# Altium PCB BAT-010.PcbDoc
Units mil, origin at the board's own origin, x right, y up, seen from the top; angles counter-clockwise.
Board outline 1750 x 1750 mil, 4 copper layers (L1 - Top Layer, L2 - GND, L3 - PWR, L4 - Bottom Layer), stack 62.178 mil thick; 15 components, 49 nets, 285 pads, 155 vias.
Unrouted connection lines stored in the file: 26.
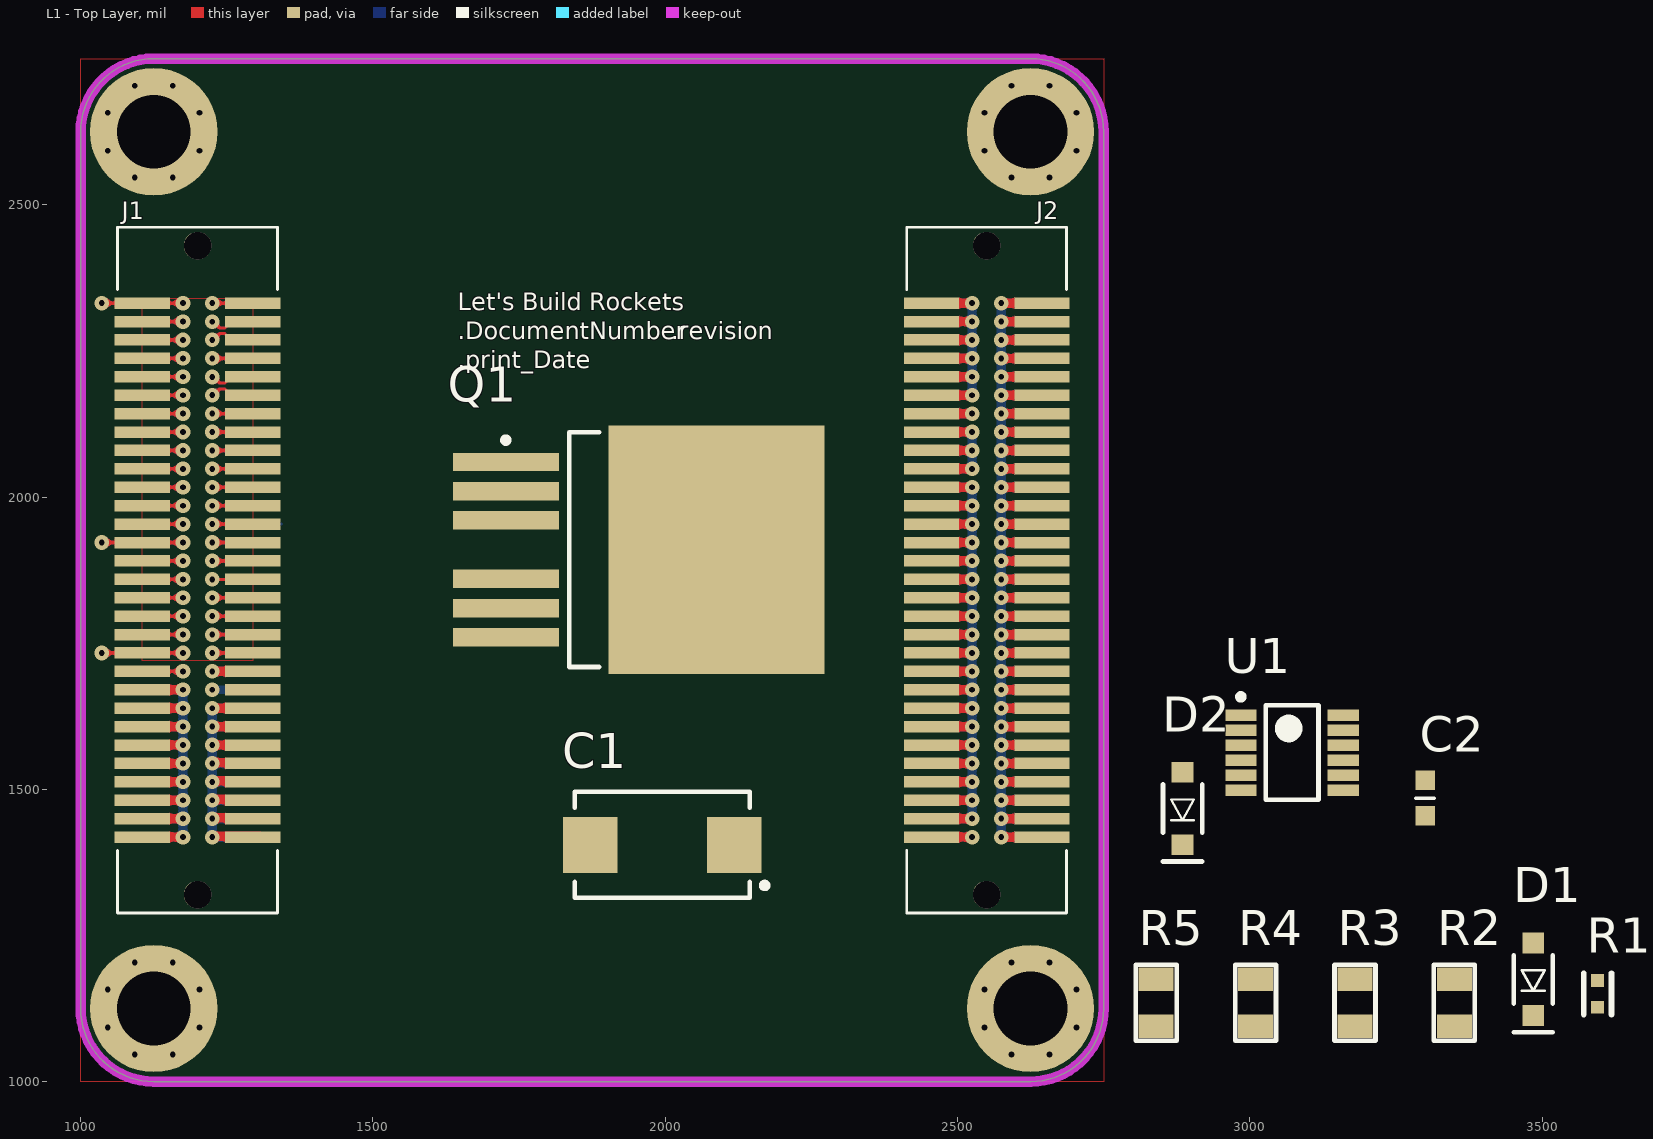
[diagram p0: L1 - Top Layer view]
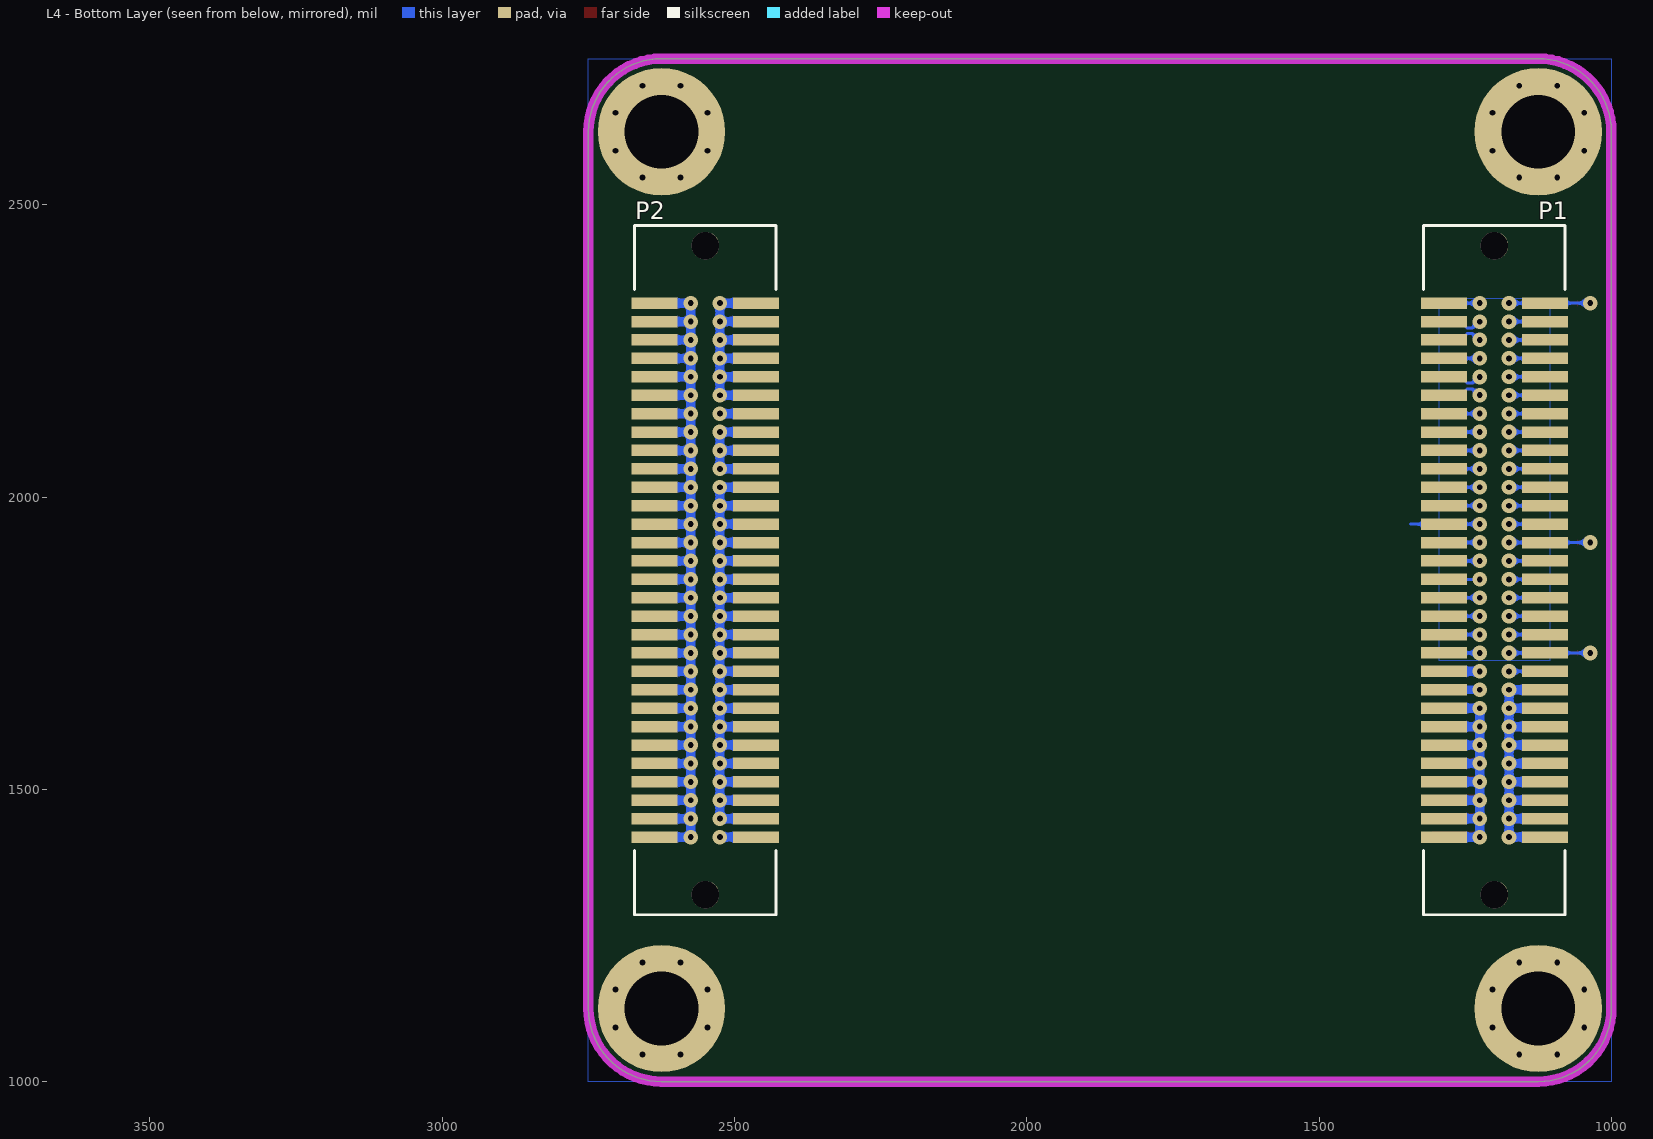
[diagram p1: L4 - Bottom Layer view, seen from below]
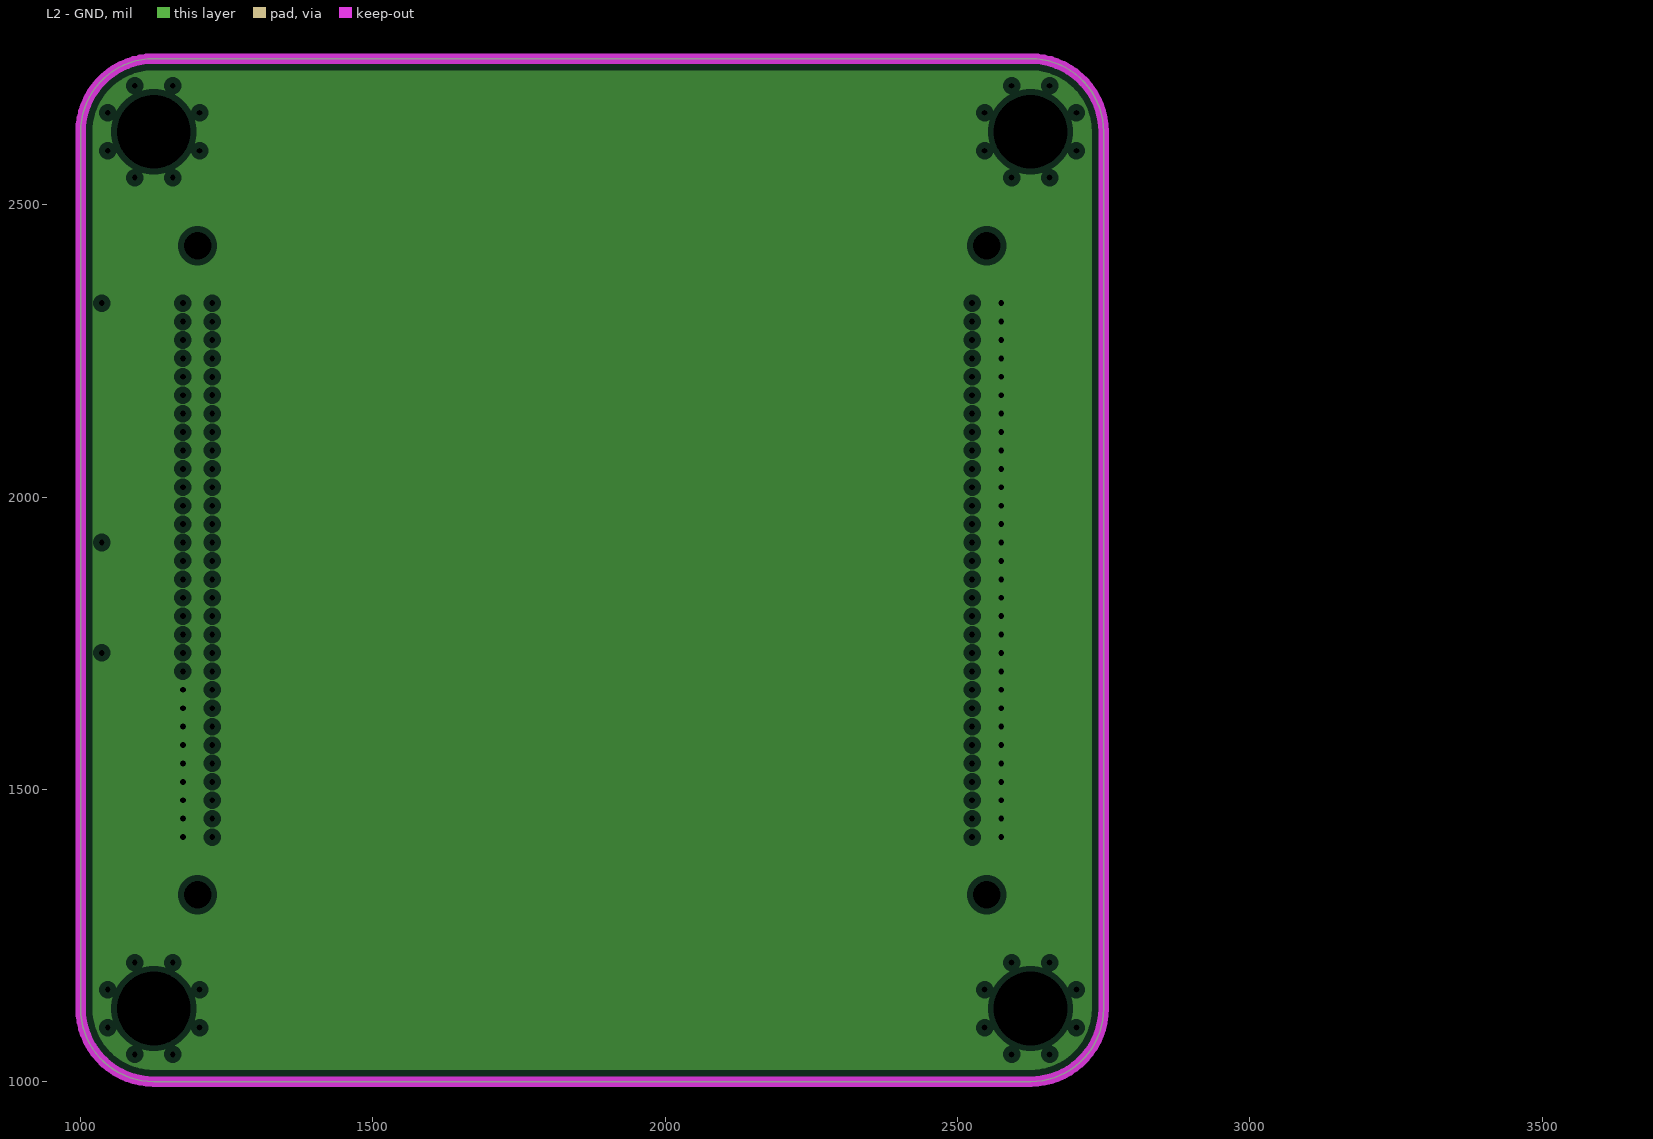
[diagram p2: L2 - GND, clearances drawn from the general rule]
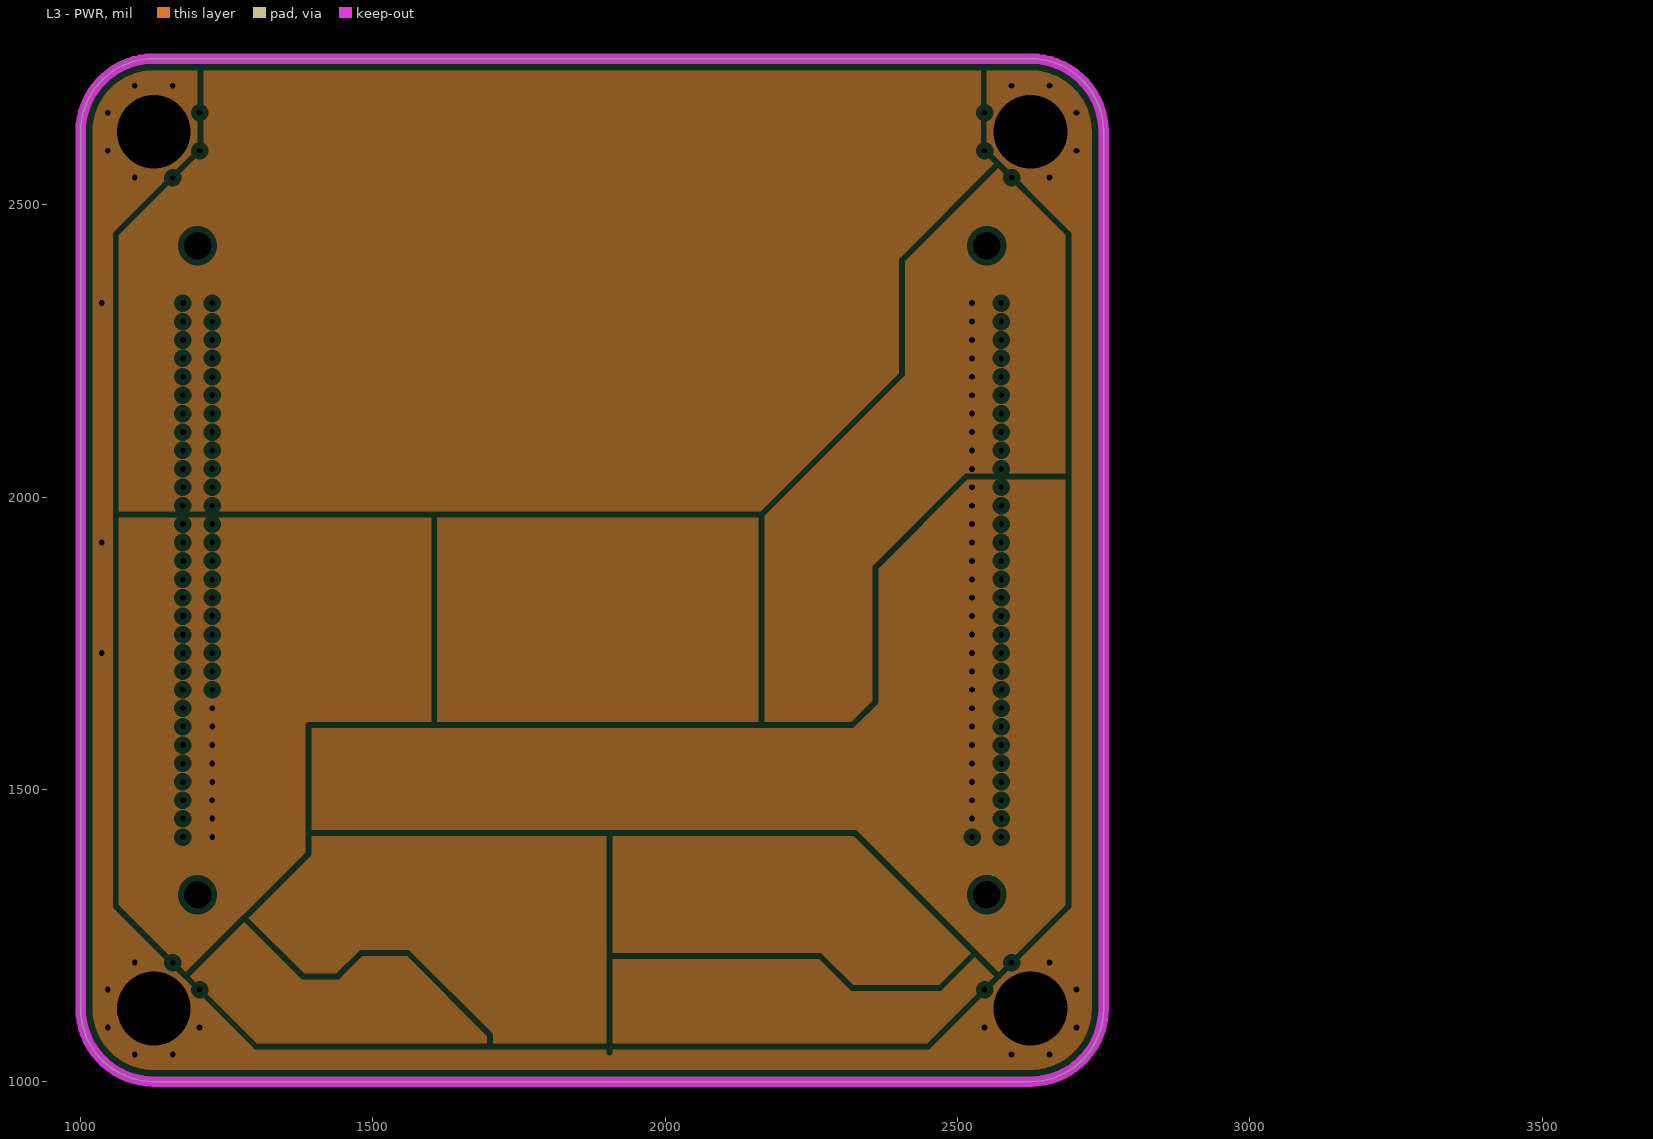
[diagram p3: L3 - PWR, clearances drawn from the general rule]

## Layer stack, top to bottom
Top Solder: solder mask 0.5, Solder Resist, Dk 3.8
L1 - Top Layer: signal copper 1.4
Dielectric 2: prepreg 4, PP-006, Dk 4.05
L2 - GND: plane copper 0.689, net GND
Dielectric 1: core 50, Core-043, Dk 4.3
L3 - PWR: plane copper 0.689, net (Multiple Nets)
Dielectric 3: prepreg 4, PP-006, Dk 4.05
L4 - Bottom Layer: signal copper 1.4
Bottom Solder: solder mask 0.5, Solder Resist, Dk 3.8

## Board outline
1000,1125 1000,2625 cw(c1125,2625) 1125,2750 2625,2750 cw(c2625,2625) 2750,2625 2750,1125 cw(c2625,1125) 2625,1000 1125,1000 cw(c1125,1125)

## Design rules (kind name [scope] priority, off if disabled: settings)
AssemblyTestPointUsage AssemblyTestPointUsage_1 [All] p2:
AssemblyTestpoint AssemblyTestpoint_1 [All] p2: testpointundercomponent=TRUE minsize=40 maxsize=100 preferedsize=60 minholesize=0 maxholesize=40 preferedholesize=32 testpointgrid=1 usegrid=TRUE gridtolerance=0.01 allowsidetop=TRUE allowsidebottom=TRUE
Clearance Clearance_HV [InNetClass('HIghVoltage')] p1: gap=6 ignorepadtopadclearanceinfootprint=FALSE except(10: Arc-Poly Track-Poly SMDPad-Poly THPad-Poly Via-Poly Fill-Poly Poly-Poly Poly-Region Poly-Text Poly-Hole)
Clearance [All] p2: gap=5 ignorepadtopadclearanceinfootprint=FALSE except(8: Arc-Poly Track-Poly SMDPad-Poly THPad-Poly Via-Poly Fill-Poly Poly-Poly Poly-Region Poly-Text Poly-Hole)
ComponentClearance ComponentClearance_1 [All] p2: gap=10 collisioncheckmode=3 verticalgap=10 showdistances=FALSE
DiffPairsRouting [All] p1: maxlimit=5 minlimit=5 mostfreqgap=5 toplayer_minwidth=5 toplayer_maxwidth=5 toplayer_prefwidth=5 bottomlayer_minwidth=5 bottomlayer_maxwidth=5 bottomlayer_prefwidth=5 impedanceprofiledriven=TRUE impedanceprofileid={FBA8A629-7972-4F76-A7E5-5756DC662DF8} impedanceprofilevalue=100.000000 maxuncoupledlength=500
FabricationTestPointUsage FabricationTestPointUsage_1 [All] p2: valid=0 allowmultiple=FALSE
FabricationTestpoint FabricationTestpoint_1 [All] p2: side=3 testpointundercomponent=TRUE minsize=40 maxsize=100 preferedsize=60 minholesize=0 maxholesize=40 preferedholesize=32 testpointgrid=1 allowsidetop=TRUE allowsidebottom=TRUE usegrid=TRUE gridtolerance=0.01
FanoutControl Fanout_LCC [IsLCC] p1: bgadir=Out bgaviamode=Centered fanoutstyle=Auto fanoutdirection=Alternating viagrid=1 // Fanout_LCC (Default Rule)
FanoutControl Fanout_BGA [IsBGA] p2: bgadir=Out bgaviamode=Centered fanoutstyle=Auto fanoutdirection=Alternating viagrid=1 // Fanout_BGA (Default Rule)
FanoutControl Fanout_Default [All] p4: bgadir=Out bgaviamode=Centered fanoutstyle=Auto fanoutdirection=Alternating viagrid=1 // Fanout_Default (Default Rule)
FanoutControl Fanout_Small [(CompPinCount < 5)] p5: bgadir=Out bgaviamode=Centered fanoutstyle=Auto fanoutdirection=OutThenIn viagrid=1 // Fanout_Small (Default Rule)
FanoutControl Fanout_BGA_1 [IsBGA] p6: bgadir=Out bgaviamode=Centered fanoutstyle=Auto fanoutdirection=Alternating viagrid=1 // Fanout_BGA (Default Rule)
FanoutControl Fanout_LCC_1 [IsLCC] p7: bgadir=Out bgaviamode=Centered fanoutstyle=Auto fanoutdirection=Alternating viagrid=1 // Fanout_LCC (Default Rule)
FanoutControl Fanout_SOIC_1 [IsSOIC] p8: bgadir=Out bgaviamode=Centered fanoutstyle=Auto fanoutdirection=Alternating viagrid=1 // Fanout_SOIC (Default Rule)
FanoutControl Fanout_Small_1 [(CompPinCount < 5)] p9: bgadir=Out bgaviamode=Centered fanoutstyle=Auto fanoutdirection=OutThenIn viagrid=1 // Fanout_Small (Default Rule)
FanoutControl Fanout_Default_1 [All] p10: bgadir=Out bgaviamode=Centered fanoutstyle=Auto fanoutdirection=Alternating viagrid=1 // Fanout_Default (Default Rule)
Height Height_Bottom [TouchesRoom('BoardHeight_Bottom') and OnBottom and not ((Name='J1') or (Name='J2') or (Name='P1') or (Name='P2') )] p1: minheight=0 maxheight=152 prefheight=0
Height Height_Top [TouchesRoom('BoardHeight_Top') and OnTop and not ((Name='J1') or (Name='J2') or (Name='P1') or (Name='P2') )] p2: minheight=0 maxheight=310 prefheight=0
HoleSize [All] p1: absolutevalues=TRUE maxlimit=130 minlimit=10 maxpercent=80.000 minpercent=20.000
MinimumSolderMaskSliver [All] p1: minsoldermaskwidth=3
PlaneClearance [All] p1: clearance=10
PlaneConnect [All] p1: pad.planeconnectstyle=Relief pad.reliefexpansion=10 pad.reliefentries=4 pad.reliefconductorwidth=10 pad.reliefairgap=10 via.planeconnectstyle=Direct via.reliefexpansion=20 via.reliefentries=4 via.reliefconductorwidth=10 via.reliefairgap=10
PolygonConnect [All] p1: thpad.connectstyle=Relief thpad.reliefconductorwidth=10 thpad.reliefentries=4 thpad.polygonreliefangle="90 Angle" thpad.airgapwidth=10 smdpad.connectstyle=Relief smdpad.reliefconductorwidth=9 smdpad.reliefentries=4 smdpad.polygonreliefangle="90 Angle" smdpad.airgapwidth=5 via.connectstyle=Direct via.reliefconductorwidth=10 via.reliefentries=4 via.polygonreliefangle="90 Angle" via.airgapwidth=10
RoomDefinition BoardHeight_Top [False] p1: confinementstyle=ConfineIn formatcopy=TRUE lockcomponents=FALSE outline 2750,2750 1000,2750 1000,1000 2750,1000
RoomDefinition BoardHeight_Bottom [False] p2: confinementstyle=ConfineIn formatcopy=TRUE lockcomponents=FALSE outline 1000,2750 2750,2750 2750,1000 1000,1000
RoutingVias [All] p1: holewidth=10 width=25 viastyle="Through Hole" minholewidth=10 minwidth=25 maxholewidth=28 maxwidth=50
SilkToBoardRegionClearance SilkToBoardRegionClearance_1 [All] p2:
SilkToSilkClearance [All] p1: silktosilkclearance=2
SilkToSolderMaskClearance [IsPad] p1: minsilkscreentomaskgap=4 clearancetoexposedcopper=TRUE
SolderMaskExpansion [All] p1: expansion=2 istentingtop=FALSE
UnRoutedNet [All] p1: checkbadconnections=TRUE
Width [All] p1: maxlimit=25 minlimit=5 preferedwidth=10 minimp=50.000000 maximp=50.000000 favimp=50.000000
17 further rules are at their usual default settings.

## Classes and differential pairs
component class Sheet2: C1 C2 D1 D2 Q1 Q3 R1 R2 R3 R4 R5 R? U1 U?
net class HIghVoltage: +VBAT +VBAT_BOOTSTRAP
component class Sheet1: J1 J2 P1 P2
differential pair CAN1: +CAN1_P -CAN1_N
differential pair CAN0: +CAN0_P -CAN0_N

## Components (designator, comment, footprint, x,y, rotation, side; value= is the part's Value field where it differs from the comment)
C1 "T521X226M063ATE075" "KEMET X - CAPMP7343X43N" 1995,1405 r180 top value=22uF
C2 "0.022µF" SMD-0603C 3300,1485 r0 top
D1 "SBR0560S1Q-7" SOD123 3485,1175 r90 top
D2 "1N4148WQ-7-F" SOD123 2885,1467.01 r90 top
J1 "10144517-062802LF" 10144517-062802LF 1200,1875 r90 top locked
J2 "10144517-062802LF" 10144517-062802LF 2550,1875 r90 top locked
P1 "10144518-064802LF" 10144518-064802LF 1200,1875 r270 bottom locked
P2 "10144518-064802LF" 10144518-064802LF 2550,1875 r270 bottom locked
Q1 "IPB180N10S402ATMA1" "DPAK127P1500X440-7N (PG-TO263-7-3)" 1940,1910 r0 top
R1 "1k" SMD-0402-RES 3595,1150 r0 top
R2 "931k" SMD-0805-RES 3350,1135 r0 top
R3 "3.9k" SMD-0805-RES 3180,1135 r0 top
R4 "38.3k" SMD-0805-RES 3010,1135 r0 top
R5 "22.1k" SMD-0805-RES 2840,1135 r0 top
U1 "LTC4231HMS-2#WPBF" TSOP65P490X109-12N 3072.4,1562.8 r0 top

## Footprints (in the part's own frame and the unit in brackets; to place one, negate y for a bottom-side part, rotate by r counter-clockwise, add the part's x,y. Pads: shape width x height; smd on the part's side, far side on the other; paste and mask are expansions set on the pad)
10144517-062802LF [mm]
  rect 0.5x2.4 smd: 1(11.6,2.4) 2(11.6,-2.4) 3(10.8,2.4) 4(10.8,-2.4) 5(10,2.4) 6(10,-2.4) 7(9.2,2.4) 8(9.2,-2.4) 9(8.4,2.4) 10(8.4,-2.4) 11(7.6,2.4) 12(7.6,-2.4) 13(6.8,2.4) 14(6.8,-2.4) 15(6,2.4) 16(6,-2.4) 17(5.2,2.4) 18(5.2,-2.4) 19(4.4,2.4) 20(4.4,-2.4) 21(3.6,2.4) 22(3.6,-2.4) 23(2.8,2.4) 24(2.8,-2.4) 25(2,2.4) 26(2,-2.4) 27(1.2,2.4) 28(1.2,-2.4) 29(0.4,2.4) 30(0.4,-2.4) 31(-0.4,2.4) 32(-0.4,-2.4) 33(-1.2,2.4) 34(-1.2,-2.4) 35(-2,2.4) 36(-2,-2.4) 37(-2.8,2.4) 38(-2.8,-2.4) 39(-3.6,2.4) 40(-3.6,-2.4) 41(-4.4,2.4) 42(-4.4,-2.4) 43(-5.2,2.4) 44(-5.2,-2.4) 45(-6,2.4) 46(-6,-2.4) 47(-6.8,2.4) 48(-6.8,-2.4) 49(-7.6,2.4) 50(-7.6,-2.4) 51(-8.4,2.4) 52(-8.4,-2.4) 53(-9.2,2.4) 54(-9.2,-2.4) 55(-10,2.4) 56(-10,-2.4) 57(-10.8,2.4) 58(-10.8,-2.4) 59(-11.6,2.4) 60(-11.6,-2.4)
  round 1.2 hole 1.2 unplated: M1(14.1,0)
  silkscreen extent -14.9,-3.47 14.9,3.47, body extent -14.9,-3.4 14.9,3.4, height 7.65
10144518-064802LF [mm]
  rect 0.5x2 smd: 1(-11.6,2.2) 2(-11.6,-2.2) 3(-10.8,2.2) 4(-10.8,-2.2) 5(-10,2.2) 6(-10,-2.2) 7(-9.2,2.2) 8(-9.2,-2.2) 9(-8.4,2.2) 10(-8.4,-2.2) 11(-7.6,2.2) 12(-7.6,-2.2) 13(-6.8,2.2) 14(-6.8,-2.2) 15(-6,2.2) 16(-6,-2.2) 17(-5.2,2.2) 18(-5.2,-2.2) 19(-4.4,2.2) 20(-4.4,-2.2) 21(-3.6,2.2) 22(-3.6,-2.2) 23(-2.8,2.2) 24(-2.8,-2.2) 25(-2,2.2) 26(-2,-2.2) 27(-1.2,2.2) 28(-1.2,-2.2) 29(-0.4,2.2) 30(-0.4,-2.2) 31(0.4,2.2) 32(0.4,-2.2) 33(1.2,2.2) 34(1.2,-2.2) 35(2,2.2) 36(2,-2.2) 37(2.8,2.2) 38(2.8,-2.2) 39(3.6,2.2) 40(3.6,-2.2) 41(4.4,2.2) 42(4.4,-2.2) 43(5.2,2.2) 44(5.2,-2.2) 45(6,2.2) 46(6,-2.2) 47(6.8,2.2) 48(6.8,-2.2) 49(7.6,2.2) 50(7.6,-2.2) 51(8.4,2.2) 52(8.4,-2.2) 53(9.2,2.2) 54(9.2,-2.2) 55(10,2.2) 56(10,-2.2) 57(10.8,2.2) 58(10.8,-2.2) 59(11.6,2.2) 60(11.6,-2.2)
  round 1.2 hole 1.2 unplated: M2(14.1,0)
  silkscreen extent -14.97,-3.08 14.97,3.08, body extent -14.9,-3 14.9,3, height 7.65
"DPAK127P1500X440-7N (PG-TO263-7-3)" [mm] "D2-PAK, 7-Pads, Body 7.82x8.46mm (max), IPC Medium Density"
  rect 9.4x10.8 smd: D(3.75,0)
  rect 4.6x0.8 smd: G(-5.4,3.81) S(-5.4,-3.81) S(-5.4,-2.54) S(-5.4,-1.27) S(-5.4,1.27) S(-5.4,2.54)
  silkscreen extent -5.52,-5.1 -1.35,5.1, body extent -7.05,-5.1 7.95,5.1, height 4.5
"KEMET X - CAPMP7343X43N" [mm] "Molded Capacitor, 2-Leads, Body 7.30x4.30mm, IPC Medium Density"
  rect 2.37x2.43 smd: 1(-3.12,0) 2(3.12,0)
  silkscreen extent -4.57,-2.3 3.8,2.3, body extent -4.02,-2.3 4.02,2.3, height 4.3
SMD-0402-RES [mm]
  rect 0.55x0.55 smd: 1(0,0.584) 2(0,-0.584)
  silkscreen extent -0.6,-0.9 0.6,0.9, body extent -0.28,-0.57 0.27,0.58, height 0.41
SMD-0603C [mm]
  rect 0.85x0.85 smd: 1(0,0.775) 2(0,-0.775)
  silkscreen extent -0.4,0 0.4,0, body extent -0.4,-0.8 0.4,0.8, height 0.9
SMD-0805-RES [mil]
  rect 60x40 smd: 1(0,40) 2(0,-40)
  silkscreen extent -35,-65 35,65, body extent -24,-39 26,39, height 31
SOD123 [mm] "SOD123 2-Leads, Body 1.55x2.70mm, Pitch 0.50mm, IPC Medium Density"
  rect 0.9x0.95 smd: A(1.575,0) K(-1.575,0)
  silkscreen extent -2.3,-0.85 1.05,0.85, body extent -1.85,-0.85 1.85,0.85, height 1.45
TSOP65P490X109-12N [mm] "TSOP, 12-Leads, Body 4.04x3.00mm, Pitch 0.65mm, IPC Medium Density"
  rect 1.35x0.5 smd mask+0.05: 1(-2.225,1.625) 2(-2.225,0.975) 3(-2.225,0.325) 4(-2.225,-0.325) 5(-2.225,-0.975) 6(-2.225,-1.625) 7(2.225,-1.625) 8(2.225,-0.975) 9(2.225,-0.325) 10(2.225,0.325) 11(2.225,0.975) 12(2.225,1.625)
  silkscreen extent -2.35,-2.05 1.15,2.55, body extent -2.45,-2.05 2.45,2.05, height 1.09

## Part data
C1: Voltage=63V, ESR=75mohm, Unit Price (USD)=7.09
C2: library part GCJ188R72A223KA01D, "CAP CER 0.022UF 100V X7R 0603", Digi-Key Part Number=490-5769-1-ND, Manufacturer="Murata Electronics North America", Operating Temperature="-55°C ~ 125°C", Package / Case="0603 (1608 Metric)", Ratings=AEC-Q200, Temperature Coefficient=X7R, Tolerance=±10%, Voltage=100V, @ qty=0, Applications="Automotive, Boardflex Sensitive", Datasheets=http://www.murata.com/~/media/webrenewal/support/library/catalog/products/capacitor/mlcc/c03e.ashx, Factory Stock=0, Features="Soft Termination", Height - Seated (Max)=-, Image=//media.digikey.com/Renders/Murata%20Renders/0603%28LQG18%29.jpg, Lead Spacing=-, Lead Style=-, Minimum Quantity=1, Mounting Type="Surface Mount, MLCC", Packaging="Cut Tape (CT)", Part Number=GCJ188R72A223KA01D, Part Status=Active, Quantity Available=40437, Series=GCJ, Size / Dimension="0.063\" L x 0.031\" W (1.60mm x 0.80mm)", Thickness (Max)="0.031\" (0.80mm)", Unit Price (USD)=0.26
Q1: Operating Temperature="-55°C ~ 175°C", Power Dissipation=300W, Ciss=14600pF, Id=180A, Qg=200nC, Rds=2.5mohm, Unit Price (USD)=5.65, VDS=100V, Vgs=20V
R1: library part ERJ-2GEJ102X, "RES SMD 1K OHM 5% 1/10W 0402", Digi-Key Part Number=P1.0KJCT-ND, Manufacturer="Panasonic Electronic Components", Operating Temperature="-55°C ~ 155°C", Package / Case="0402 (1005 Metric)", Power (Watts)="0.1W, 1/10W", Supplier Device Package=0402, Temperature Coefficient=±200ppm/°C, Tolerance=±5%, @ qty=1500, Composition="Thick Film", Datasheets=http://industrial.panasonic.com/www-cgi/jvcr13pz.cgi?E+PZ+3+AOA0001+ERJ2GEJ102X+7+WW, Factory Stock=0, Failure Rate=-, Features="Automotive AEC-Q200", Height - Seated (Max)="0.016\" (0.40mm)", Image=//media.digikey.com/Photos/Panasonic%20Photos/ERJ-PA2-Series.jpg, Minimum Quantity=1, Number of Terminations=2, Packaging="Cut Tape (CT)", Part Number=ERJ-2GEJ102X, Part Status=Active, Quantity Available=1939857, Series=ERJ, Size / Dimension="0.039\" L x 0.020\" W (1.00mm x 0.50mm)", Unit Price (USD)=0.00350
R2: library part ERJ-PB6B9313V, "RES SMD 931K OHM 0.1% 1/4W 0805", Digi-Key Part Number=P20933CT-ND, Manufacturer="Panasonic Electronic Components", Operating Temperature="-55°C ~ 155°C", Package / Case="0805 (2012 Metric)", Power (Watts)="0.25W, 1/4W", Supplier Device Package=0805, Temperature Coefficient=±50ppm/°C, Tolerance=±0.1%, @ qty=1000, Composition="Thick Film", Datasheets=https://industrial.panasonic.com/cdbs/www-data/pdf/RDA0000/AOA0000C100.pdf, Factory Stock=0, Failure Rate=-, Features="Automotive AEC-Q200, Pulse Withstanding", Height - Seated (Max)="0.028\" (0.70mm)", Image=//media.digikey.com/Renders/Panasonic%20Renders/ERJ-0805%20Pkg.jpg, Minimum Quantity=1, Number of Terminations=2, Packaging="Cut Tape (CT)", Part Number=ERJ-PB6B9313V, Part Status=Active, Quantity Available=10000, Series=ERJ, Size / Dimension="0.079\" L x 0.049\" W (2.00mm x 1.25mm)", Unit Price (USD)=0.04554
R3: library part ERJ-PB6B3901V, "RES SMD 3.9K OHM 0.1% 1/4W 0805", Digi-Key Part Number=P20660CT-ND, Manufacturer="Panasonic Electronic Components", Operating Temperature="-55°C ~ 155°C", Package / Case="0805 (2012 Metric)", Power (Watts)="0.25W, 1/4W", Supplier Device Package=0805, Temperature Coefficient=±50ppm/°C, Tolerance=±0.1%, @ qty=1000, Composition="Thick Film", Datasheets=https://industrial.panasonic.com/cdbs/www-data/pdf/RDA0000/AOA0000C100.pdf, Factory Stock=0, Failure Rate=-, Features="Automotive AEC-Q200, Pulse Withstanding", Height - Seated (Max)="0.028\" (0.70mm)", Image=//media.digikey.com/Renders/Panasonic%20Renders/ERJ-0805%20Pkg.jpg, Minimum Quantity=1, Number of Terminations=2, Packaging="Cut Tape (CT)", Part Number=ERJ-PB6B3901V, Part Status=Active, Quantity Available=10000, Series=ERJ, Size / Dimension="0.079\" L x 0.049\" W (2.00mm x 1.25mm)", Unit Price (USD)=0.04554
R4: library part ERJ-PB6B3832V, "RES SMD 38.3K OHM 0.1% 1/4W 0805", Digi-Key Part Number=P20773CT-ND, Manufacturer="Panasonic Electronic Components", Operating Temperature="-55°C ~ 155°C", Package / Case="0805 (2012 Metric)", Power (Watts)="0.25W, 1/4W", Supplier Device Package=0805, Temperature Coefficient=±50ppm/°C, Tolerance=±0.1%, @ qty=1000, Composition="Thick Film", Datasheets=https://industrial.panasonic.com/cdbs/www-data/pdf/RDA0000/AOA0000C100.pdf, Factory Stock=0, Failure Rate=-, Features="Automotive AEC-Q200, Pulse Withstanding", Height - Seated (Max)="0.028\" (0.70mm)", Image=//media.digikey.com/Renders/Panasonic%20Renders/ERJ-0805%20Pkg.jpg, Minimum Quantity=1, Number of Terminations=2, Packaging="Cut Tape (CT)", Part Number=ERJ-PB6B3832V, Part Status=Active, Quantity Available=10000, Series=ERJ, Size / Dimension="0.079\" L x 0.049\" W (2.00mm x 1.25mm)", Unit Price (USD)=0.04554
R5: library part ERJ-PB6B2212V, "RES SMD 22.1K OHM 0.1% 1/4W 0805", Digi-Key Part Number=P20745CT-ND, Manufacturer="Panasonic Electronic Components", Operating Temperature="-55°C ~ 155°C", Package / Case="0805 (2012 Metric)", Power (Watts)="0.25W, 1/4W", Supplier Device Package=0805, Temperature Coefficient=±50ppm/°C, Tolerance=±0.1%, @ qty=1000, Composition="Thick Film", Datasheets=https://industrial.panasonic.com/cdbs/www-data/pdf/RDA0000/AOA0000C100.pdf, Factory Stock=0, Failure Rate=-, Features="Automotive AEC-Q200, Pulse Withstanding", Height - Seated (Max)="0.028\" (0.70mm)", Image=//media.digikey.com/Renders/Panasonic%20Renders/ERJ-0805%20Pkg.jpg, Minimum Quantity=1, Number of Terminations=2, Packaging="Cut Tape (CT)", Part Number=ERJ-PB6B2212V, Part Status=Active, Quantity Available=10000, Series=ERJ, Size / Dimension="0.079\" L x 0.049\" W (2.00mm x 1.25mm)", Unit Price (USD)=0.04554
D1: Unit Price (USD)=0.37
D2: Unit Price (USD)=0.19
J1 J2: Unit Price (USD)=1.28
P1 P2: Unit Price (USD)=1.52
U1: Unit Price (USD)=8.24

## Free pads (board coordinates)
  round 218 hole 125.98: 0(1125,1125) 0(1125,2625) 0(2625,1125) 0(2625,2625)

## Via types
v1: diameter 25, hole 10, L1 - Top Layer to L4 - Bottom Layer, tented both sides, 155 vias

## Nets (pads, with @x,y where several pads share a name; then routed paths per layer and width w, separated by ;. In a path a pad name is that pad's centre, name@x,y a point inside that pad or via, vN(x,y) a via of type N, cw(c..) or ccw(c..) an arc to the next point about the centre after c; other vN are vias at no path point)
+0.9V_REF: J1.42 P1.42 | length 131.1
  L1 - Top Layer w15: v1(1225,1701.77) J1.42
  L4 - Bottom Layer w15: v1(1225,1701.77) P1.42
+5V: J1.46 J1.48 J1.50 J1.52 J1.54 J1.56 J1.58 J1.60 P1.46 P1.48 P1.50 P1.52 P1.54 P1.56 P1.58 P1.60 | length 1269.3
  L1 - Top Layer w15: v1(1225,1575.79) J1.50 ; v1(1225,1607.28) J1.48 ; v1(1225,1638.78) J1.46 ; v1@1235.51,1420 J1.60@1305,1420 ; v1@1235.51,1451.5 J1.58@1305,1451.5 ; v1@1235.51,1482.99 J1.56@1305,1482.99 ; v1@1235.51,1514.49 J1.54@1305,1514.49 ; v1@1235.51,1545.98 J1.52@1305,1545.98
  L4 - Bottom Layer w15: P1.60 v1(1225,1418.31) v1(1225,1449.8) ; P1.58 v1(1225,1449.8) ; P1.56 v1(1225,1481.3) ; P1.54 v1(1225,1512.8) ; P1.52 v1(1225,1544.29) ; P1.50 v1(1225,1575.79) ; P1.48 v1(1225,1607.28) ; P1.46 v1(1225,1638.78) v1(1225,1607.28) ; v1(1225,1449.8) v1(1225,1481.3) ; v1(1225,1481.3) v1(1225,1512.8) ; v1(1225,1512.8) v1(1225,1544.29) ; v1(1225,1544.29) v1(1225,1575.79) ; v1(1225,1575.79) v1(1225,1607.28)
+5V_BOOTSTRAP: J1.44 P1.44 | length 61.6
  L4 - Bottom Layer w15: v1(1225,1670.28) P1.44
+12V: J2.1 J2.3 J2.5 J2.7 J2.9 J2.11 J2.13 J2.15 J2.17 J2.19 P2.1 P2.3 P2.5 P2.7 P2.9 P2.11 P2.13 P2.15 P2.17 P2.19 | length 1531.5
  L1 - Top Layer w15: J2.19 v1(2525,2048.23) ; J2.17 v1(2525,2079.72) ; J2.15 v1(2525,2111.22) ; J2.13 v1(2525,2142.72) ; J2.11 v1(2525,2174.21) ; J2.9 v1(2525,2205.71) ; J2.7 v1(2525,2237.2) ; J2.5 v1(2525,2268.7) ; J2.3 v1(2525,2300.2) ; J2.1 v1(2525,2331.69)
  L4 - Bottom Layer w15: P2.19 v1(2525,2048.23) v1(2525,2079.72) ; P2.17 v1(2525,2079.72) ; P2.15 v1(2525,2111.22) v1(2525,2079.72) ; P2.13 v1(2525,2142.72) ; P2.11 v1(2525,2174.21) v1(2525,2205.71) ; P2.9 v1(2525,2205.71) ; P2.7 v1(2525,2237.2) ; P2.5 v1(2525,2268.7) ; P2.3 v1(2525,2300.2) ; P2.1 v1(2525,2331.69) v1(2525,2300.2) ; v1(2525,2205.71) v1(2525,2237.2) ; v1(2525,2237.2) v1(2525,2268.7) ; v1(2525,2268.7) v1(2525,2300.2)
+VBAT: C1.1 J2.21 J2.23 J2.25 J2.27 J2.29 J2.31 J2.33 J2.35 J2.37 J2.39 J2.41 J2.43 J2.45 J2.47 J2.49 J2.51 J2.53 J2.55 J2.57 P2.21 P2.23 P2.25 P2.27 P2.29 P2.31 P2.33 P2.35 P2.37 P2.39 P2.41 P2.43 P2.45 P2.47 P2.49 P2.51 P2.53 P2.55 P2.57 | length 3057.9
  L1 - Top Layer w15: J2.57 v1(2525,1449.8) ; J2.55 v1(2525,1481.3) ; J2.53 v1(2525,1512.8) ; J2.51 v1(2525,1544.29) ; J2.49 v1(2525,1575.79) ; J2.47 v1(2525,1607.28) ; J2.45 v1(2525,1638.78) ; J2.43 v1(2525,1670.28) ; J2.41 v1(2525,1701.77) ; J2.39 v1(2525,1733.27) ; J2.37 v1(2525,1764.76) ; J2.35 v1(2525,1796.26) ; J2.33 v1(2525,1827.76) ; J2.31 v1(2525,1859.25) ; J2.29 v1(2525,1890.75) ; J2.27 v1(2525,1922.24) ; J2.25 v1(2525,1953.74) ; J2.23 v1(2525,1985.24) ; J2.21 v1(2525,2016.73)
  L4 - Bottom Layer w15: P2.57 v1(2525,1449.8) v1(2525,1481.3) ; P2.55 v1(2525,1481.3) ; P2.53 v1(2525,1512.8) ; P2.51 v1(2525,1544.29) ; P2.49 v1(2525,1575.79) ; P2.47 v1(2525,1607.28) ; P2.45 v1(2525,1638.78) ; P2.43 v1(2525,1670.28) ; P2.41 v1(2525,1701.77) ; P2.39 v1(2525,1733.27) ; P2.37 v1(2525,1764.76) ; P2.35 v1(2525,1796.26) ; P2.33 v1(2525,1827.76) ; P2.31 v1(2525,1859.25) ; P2.29 v1(2525,1890.75) ; P2.27 v1(2525,1922.24) ; P2.25 v1(2525,1953.74) ; P2.23 v1(2525,1985.24) ; P2.21 v1(2525,2016.73) v1(2525,1985.24) ; v1(2525,1481.3) v1(2525,1512.8) ; v1(2525,1512.8) v1(2525,1544.29) ; v1(2525,1544.29) v1(2525,1575.79) ; v1(2525,1575.79) v1(2525,1607.28) ; v1(2525,1607.28) v1(2525,1638.78) ; v1(2525,1638.78) v1(2525,1670.28) ; v1(2525,1670.28) v1(2525,1701.77) ; v1(2525,1701.77) v1(2525,1733.27) ; v1(2525,1733.27) v1(2525,1764.76) ; v1(2525,1764.76) v1(2525,1796.26) ; v1(2525,1796.26) v1(2525,1827.76) ; v1(2525,1827.76) v1(2525,1859.25) ; v1(2525,1859.25) v1(2525,1890.75) ; v1(2525,1890.75) v1(2525,1922.24) ; v1(2525,1922.24) v1(2525,1953.74) ; v1(2525,1953.74) v1(2525,1985.24)
+VBAT_BOOTSTRAP: D1.K J2.59 P2.59 | length 131.1
  L1 - Top Layer w15: J2.59 v1(2525,1418.31)
  L4 - Bottom Layer w15: P2.59 v1(2525,1418.31)
+VIN: D1.A R2.1 U1.2 U1.3
CAN0_N: J1.4 P1.4 | length 149.3
  L1 - Top Layer w5: v1(1225,2299.95) 1227.43,2299.95 1237.93,2289.45 1246.82,2289.45 1249.74,2292.38 1249.74,2292.85 1257.09,2300.2 J1.4
  L4 - Bottom Layer w5: v1(1225,2299.95) 1227.43,2299.95 1237.93,2289.45 1246.82,2289.45 1249.74,2292.38 1249.74,2292.85 1257.09,2300.2 P1.4
CAN0_P: J1.6 P1.6 | length 149.3
  L1 - Top Layer w5: v1(1225,2268.95) 1227.43,2268.95 1237.93,2279.45 1246.82,2279.45 1249.74,2276.52 1249.74,2276.04 1257.09,2268.7 J1.6
  L4 - Bottom Layer w5: v1(1225,2268.95) 1227.43,2268.95 1237.93,2279.45 1246.82,2279.45 1249.74,2276.52 1249.74,2276.04 1257.09,2268.7 P1.6
CAN1_N: J1.10 P1.10 | length 149.3
  L1 - Top Layer w5: v1(1225,2205.46) 1227.43,2205.46 1237.93,2194.96 1246.82,2194.96 1249.74,2197.89 1249.74,2198.37 1257.09,2205.71 J1.10
  L4 - Bottom Layer w5: v1(1225,2205.46) 1227.43,2205.46 1237.93,2194.96 1246.82,2194.96 1249.74,2197.89 1249.74,2198.37 1257.09,2205.71 P1.10
CAN1_P: J1.12 P1.12 | length 149.3
  L1 - Top Layer w5: v1(1225,2174.46) 1227.43,2174.46 1237.93,2184.96 1246.82,2184.96 1249.74,2182.03 1249.74,2181.55 1257.09,2174.21 J1.12
  L4 - Bottom Layer w5: v1(1225,2174.46) 1227.43,2174.46 1237.93,2184.96 1246.82,2184.96 1249.74,2182.03 1249.74,2181.56 1257.09,2174.21 P1.12
CTRL_SYNC: J1.26 P1.26 | length 188.2
  L1 - Top Layer w5: v1(1225,1953.74) J1.26
  L4 - Bottom Layer w5: v1(1225,1953.74) P1.26 1343.74,1953.74
DETECT: J1.32 P1.32 | length 131.1
  L1 - Top Layer w5: v1(1225,1859.25) J1.32
  L4 - Bottom Layer w5: v1(1225,1859.25) P1.32
DRAIN: J1.1 J1.2 J1.8 J1.14 J1.20 J1.24 J1.27 J1.28 J1.39 J1.40 P1.1 P1.2 P1.8 P1.14 P1.20 P1.24 P1.27 P1.28 P1.39 P1.40 pad.0 | length 1704.3
  L1 - Top Layer w5: v1(1036.02,1733.27) J1.39 v1(1175,1733.27) ; v1(1036.02,1922.24) J1.27 v1(1175,1922.24) ; v1(1036.02,2331.69) J1.1 v1(1175,2331.69) ; v1(1225,1733.27) J1.40 ; v1(1225,1922.24) J1.28 ; v1(1225,1985.24) J1.24 ; v1(1225,2048.23) J1.20 ; v1(1225,2142.72) J1.14 ; v1(1225,2237.2) J1.8 ; v1(1225,2331.69) J1.2
  L4 - Bottom Layer w5: v1(1036.02,1733.27) P1.39@1097.64,1733.27 ; v1(1036.02,1922.24) P1.27@1097.64,1922.24 ; v1(1036.02,2331.69) P1.1@1097.64,2331.69 ; P1.39 v1(1175,1733.27) ; P1.27 v1(1175,1922.24) ; P1.1 v1(1175,2331.69) ; v1(1225,1733.27) P1.40 ; v1(1225,1922.24) P1.28 ; v1(1225,1985.24) P1.24 ; v1(1225,2048.23) P1.20 ; v1(1225,2142.72) P1.14 ; v1(1225,2237.2) P1.8 ; v1(1225,2331.69) P1.2
  other v1: 1092.47,1046.47 1157.53,1046.47 2592.47,1046.47 2657.53,1046.47 1046.47,1092.47 1203.53,1092.47 2546.47,1092.47 2703.53,1092.47 1046.47,1157.53 1203.53,1157.53 2546.47,1157.53 2703.53,1157.53 1092.47,1203.53 1157.53,1203.53 2592.47,1203.53 2657.53,1203.53 1092.47,2546.47 1157.53,2546.47 2592.47,2546.47 2657.53,2546.47 1046.47,2592.47 1203.53,2592.47 2546.47,2592.47 2703.53,2592.47 1046.47,2657.53 1203.53,2657.53 2546.47,2657.53 2703.53,2657.53 1092.47,2703.53 1157.53,2703.53 2592.47,2703.53 2657.53,2703.53
EN_0: J1.34 P1.34 | length 131.1
  L1 - Top Layer w5: v1(1225,1827.76) J1.34
  L4 - Bottom Layer w5: v1(1225,1827.76) P1.34
EN_1: J1.36 P1.36 | length 131.1
  L1 - Top Layer w5: v1(1225,1796.26) J1.36
  L4 - Bottom Layer w5: v1(1225,1796.26) P1.36
EN_2: J1.38 P1.38 | length 131.1
  L1 - Top Layer w5: v1(1225,1764.76) J1.38
  L4 - Bottom Layer w5: v1(1225,1764.76) P1.38
GND: C1.2 C2.2 J1.43 J1.45 J1.47 J1.49 J1.51 J1.53 J1.55 J1.57 J1.59 J2.2 J2.4 J2.6 J2.8 J2.10 J2.12 J2.14 J2.16 J2.18 J2.20 J2.22 J2.24 J2.26 J2.28 J2.30 J2.32 J2.34 J2.36 J2.38 J2.40 J2.42 J2.44 J2.46 J2.48 J2.50 J2.52 J2.54 J2.56 J2.58 J2.60 P1.43 P1.45 P1.47 P1.49 P1.51 P1.53 P1.55 P1.57 P1.59 P2.2 P2.4 P2.6 P2.8 P2.10 P2.12 P2.14 P2.16 P2.18 P2.20 P2.22 P2.24 P2.26 P2.28 P2.30 P2.32 P2.34 P2.36 P2.38 P2.40 P2.42 P2.44 P2.46 P2.48 P2.50 P2.52 P2.54 P2.56 P2.58 P2.60 U1.8 | length 6278.3
  L1 - Top Layer w15: J1.59 v1(1175,1418.31) ; J1.57 v1(1175,1449.8) ; J1.55 v1(1175,1481.3) ; J1.53 v1(1175,1512.8) ; J1.51 v1(1175,1544.29) ; J1.49 v1(1175,1575.79) ; J1.47 v1(1175,1607.28) ; J1.45 v1(1175,1638.78) ; J1.43 v1(1175,1670.28) ; v1(2575,1418.31) J2.60 ; v1(2575,1449.8) J2.58 ; v1(2575,1481.3) J2.56 ; v1(2575,1512.8) J2.54 ; v1(2575,1544.29) J2.52 ; v1(2575,1575.79) J2.50 ; v1(2575,1607.28) J2.48 ; v1(2575,1638.78) J2.46 ; v1(2575,1670.28) J2.44 ; v1(2575,1701.77) J2.42 ; v1(2575,1733.27) J2.40 ; v1(2575,1764.76) J2.38 ; v1(2575,1796.26) J2.36 ; v1(2575,1827.76) J2.34 ; v1(2575,1859.25) J2.32 ; v1(2575,1890.75) J2.30 ; v1(2575,1922.24) J2.28 ; v1(2575,1953.74) J2.26 ; v1(2575,1985.24) J2.24 ; v1(2575,2016.73) J2.22 ; v1(2575,2048.23) J2.20 ; v1(2575,2079.72) J2.18 ; v1(2575,2111.22) J2.16 ; v1(2575,2142.72) J2.14 ; v1(2575,2174.21) J2.12 ; v1(2575,2205.71) J2.10 ; v1(2575,2237.2) J2.8 ; v1(2575,2268.7) J2.6 ; v1(2575,2300.2) J2.4 ; v1(2575,2331.69) J2.2
  L4 - Bottom Layer w15: P1.59 v1(1175,1418.31) v1(1175,1449.8) ; P1.57 v1(1175,1449.8) ; P1.55 v1(1175,1481.3) ; P1.53 v1(1175,1512.8) ; P1.51 v1(1175,1544.29) ; P1.49 v1(1175,1575.79) ; P1.47 v1(1175,1607.28) ; P1.45 v1(1175,1638.78) ; P1.43 v1(1175,1670.28) v1(1175,1638.78) ; P2.60 v1(2575,1418.31) v1(2575,1449.8) ; P2.58 v1(2575,1449.8) ; P2.56 v1(2575,1481.3) ; P2.54 v1(2575,1512.8) ; P2.52 v1(2575,1544.29) ; P2.50 v1(2575,1575.79) ; P2.48 v1(2575,1607.28) ; P2.46 v1(2575,1638.78) ; P2.44 v1(2575,1670.28) ; P2.42 v1(2575,1701.77) ; P2.40 v1(2575,1733.27) ; P2.38 v1(2575,1764.76) ; P2.36 v1(2575,1796.26) ; P2.34 v1(2575,1827.76) ; P2.32 v1(2575,1859.25) ; P2.30 v1(2575,1890.75) ; P2.28 v1(2575,1922.24) ; P2.26 v1(2575,1953.74) ; P2.24 v1(2575,1985.24) ; P2.22 v1(2575,2016.73) ; P2.20 v1(2575,2048.23) ; P2.18 v1(2575,2079.72) ; P2.16 v1(2575,2111.22) ; P2.14 v1(2575,2142.72) ; P2.12 v1(2575,2174.21) ; P2.10 v1(2575,2205.71) ; P2.8 v1(2575,2237.2) ; P2.6 v1(2575,2268.7) ; P2.4 v1(2575,2300.2) ; P2.2 v1(2575,2331.69) v1(2575,2300.2) ; v1(1175,1449.8) v1(1175,1481.3) ; v1(1175,1481.3) v1(1175,1512.8) ; v1(1175,1512.8) v1(1175,1544.29) ; v1(1175,1544.29) v1(1175,1575.79) ; v1(1175,1575.79) v1(1175,1607.28) ; v1(1175,1607.28) v1(1175,1638.78) ; v1(2575,1449.8) v1(2575,1481.3) ; v1(2575,1481.3) v1(2575,1512.8) ; v1(2575,1512.8) v1(2575,1544.29) ; v1(2575,1544.29) v1(2575,1575.79) ; v1(2575,1575.79) v1(2575,1607.28) ; v1(2575,1607.28) v1(2575,1638.78) ; v1(2575,1638.78) v1(2575,1670.28) ; v1(2575,1670.28) v1(2575,1701.77) ; v1(2575,1701.77) v1(2575,1733.27) ; v1(2575,1733.27) v1(2575,1764.76) ; v1(2575,1764.76) v1(2575,1796.26) ; v1(2575,1796.26) v1(2575,1827.76) ; v1(2575,1827.76) v1(2575,1859.25) ; v1(2575,1859.25) v1(2575,1890.75) ; v1(2575,1890.75) v1(2575,1922.24) ; v1(2575,1922.24) v1(2575,1953.74) ; v1(2575,1953.74) v1(2575,1985.24) ; v1(2575,1985.24) v1(2575,2016.73) ; v1(2575,2016.73) v1(2575,2048.23) ; v1(2575,2048.23) v1(2575,2079.72) ; v1(2575,2079.72) v1(2575,2111.22) ; v1(2575,2111.22) v1(2575,2142.72) ; v1(2575,2142.72) v1(2575,2174.21) ; v1(2575,2174.21) v1(2575,2205.71) ; v1(2575,2205.71) v1(2575,2237.2) ; v1(2575,2237.2) v1(2575,2268.7) ; v1(2575,2268.7) v1(2575,2300.2)
GNDSW: R5.1 U1.7
I2C_SCL: J1.18 P1.18 | length 131.1
  L1 - Top Layer w5: v1(1225,2079.72) J1.18
  L4 - Bottom Layer w5: v1(1225,2079.72) P1.18
I2C_SDA: J1.16 P1.16 | length 131.1
  L1 - Top Layer w5: v1(1225,2111.22) J1.16
  L4 - Bottom Layer w5: v1(1225,2111.22) P1.16
NetC2_1: C2.1 D2.K
NetD2_A: D2.A Q1.G R1.1 U1.12
NetQ1_D: Q1.D U1.1
NetQ1_S: Q1.S U1.11
NetQ3_B: R1.2
OV: R4.2 R5.2 U1.6
P_GOOD: J1.30 P1.30 | length 131.1
  L1 - Top Layer w5: v1(1225,1890.75) J1.30
  L4 - Bottom Layer w5: v1(1225,1890.75) P1.30
PPS: J1.22 P1.22 | length 131.1
  L1 - Top Layer w5: v1(1225,2016.73) J1.22
  L4 - Bottom Layer w5: v1(1225,2016.73) P1.22
QSPI_CLK: J1.29 P1.29 | length 131.1
  L1 - Top Layer w5: J1.29 v1(1175,1890.75)
  L4 - Bottom Layer w5: P1.29 v1(1175,1890.75)
QSPI_IO0: J1.31 P1.31 | length 131.1
  L1 - Top Layer w5: J1.31 v1(1175,1859.25)
  L4 - Bottom Layer w5: P1.31 v1(1175,1859.25)
QSPI_IO1: J1.33 P1.33 | length 131.1
  L1 - Top Layer w5: J1.33 v1(1175,1827.76)
  L4 - Bottom Layer w5: P1.33 v1(1175,1827.76)
QSPI_IO2: J1.35 P1.35 | length 131.1
  L1 - Top Layer w5: J1.35 v1(1175,1796.26)
  L4 - Bottom Layer w5: P1.35 v1(1175,1796.26)
QSPI_IO3: J1.37 P1.37 | length 131.1
  L1 - Top Layer w5: J1.37 v1(1175,1764.76)
  L4 - Bottom Layer w5: P1.37 v1(1175,1764.76)
RFU_3: J1.3 P1.3 | length 131.1
  L1 - Top Layer w5: J1.3 v1(1175,2300.2)
  L4 - Bottom Layer w5: P1.3 v1(1175,2300.2)
RFU_5: J1.5 P1.5 | length 131.1
  L1 - Top Layer w5: J1.5 v1(1175,2268.7)
  L4 - Bottom Layer w5: P1.5 v1(1175,2268.7)
RFU_7: J1.7 P1.7 | length 131.1
  L1 - Top Layer w5: J1.7 v1(1175,2237.2)
  L4 - Bottom Layer w5: P1.7 v1(1175,2237.2)
RFU_9: J1.9 P1.9 | length 131.1
  L1 - Top Layer w5: J1.9 v1(1175,2205.71)
  L4 - Bottom Layer w5: P1.9 v1(1175,2205.71)
RFU_11: J1.11 P1.11 | length 131.1
  L1 - Top Layer w5: J1.11 v1(1175,2174.21)
  L4 - Bottom Layer w5: P1.11 v1(1175,2174.21)
RFU_13: J1.13 P1.13 | length 131.1
  L1 - Top Layer w5: J1.13 v1(1175,2142.72)
  L4 - Bottom Layer w5: P1.13 v1(1175,2142.72)
RFU_15: J1.15 P1.15 | length 131.1
  L1 - Top Layer w5: J1.15 v1(1175,2111.22)
  L4 - Bottom Layer w5: P1.15 v1(1175,2111.22)
RFU_17: J1.17 P1.17 | length 131.1
  L1 - Top Layer w5: J1.17 v1(1175,2079.72)
  L4 - Bottom Layer w5: P1.17 v1(1175,2079.72)
RFU_19: J1.19 P1.19 | length 131.1
  L1 - Top Layer w5: J1.19 v1(1175,2048.23)
  L4 - Bottom Layer w5: P1.19 v1(1175,2048.23)
RFU_21: J1.21 P1.21 | length 131.1
  L1 - Top Layer w5: J1.21 v1(1175,2016.73)
  L4 - Bottom Layer w5: P1.21 v1(1175,2016.73)
RFU_23: J1.23 P1.23 | length 131.1
  L1 - Top Layer w5: J1.23 v1(1175,1985.24)
  L4 - Bottom Layer w5: P1.23 v1(1175,1985.24)
RFU_25: J1.25 P1.25 | length 131.1
  L1 - Top Layer w5: J1.25 v1(1175,1953.74)
  L4 - Bottom Layer w5: P1.25 v1(1175,1953.74)
SYNC_0: J1.41 P1.41 | length 131.1
  L1 - Top Layer w5: J1.41 v1(1175,1701.77)
  L4 - Bottom Layer w5: P1.41 v1(1175,1701.77)
UVH: R3.2 R4.1 U1.5
UVL: R2.2 R3.1 U1.4
pads on no net: J1.M1 J2.M1 P1.M2 P2.M2 U1.9 U1.10

## Polygon pours and split planes (outlines as drawn)
GND on L1 - Top Layer "Top Layer-GND" (solid, remove dead copper, shelved, pour order 18): 1000,2750 2750,2750 2750,1000 1000,1000
DRAIN on L1 - Top Layer "Top Layer-DRAIN" (solid, remove dead copper, shelved, pour order 8): 1105.51,2340 1294.49,2340 1294.49,1720 1105.51,1720
GND on L4 - Bottom Layer "Bottom Layer-GND" (solid, remove dead copper, shelved, pour order 21): 2750,2750 1000,2750 1000,1000 2750,1000
DRAIN on L4 - Bottom Layer "Bottom Layer-DRAIN" (solid, remove dead copper, shelved, pour order 7): 1294.49,2340 1105.51,2340 1105.51,1720 1294.49,1720
GND on L2 - GND (split plane): 2634.15,2729.6 2643.23,2728.4 2652.18,2726.42 2660.91,2723.67 2669.38,2720.16 2677.5,2715.93 2685.23,2711.01 2692.49,2705.43 2699.25,2699.25 2705.43,2692.49 2711.01,2685.23 2715.93,2677.5 2720.16,2669.38 2723.67,2660.91 2726.42,2652.18 2728.4,2643.23 2729.6,2634.15 2729.97,2625.68 2729.9,2625 2729.9,1125 2729.97,1124.32 2729.6,1115.85 2728.4,1106.76 2726.42,1097.82 2723.67,1089.09 2720.16,1080.62 2715.93,1072.5 2711.01,1064.77 2705.44,1057.51 2699.25,1050.75 2692.49,1044.56 2685.23,1038.99 2677.5,1034.07 2669.38,1029.84 2660.91,1026.33 2652.18,1023.58 2643.24,1021.6 2634.15,1020.4 2625.68,1020.03 2625,1020.1 1125,1020.1 1124.32,1020.03 1115.85,1020.4 1106.77,1021.6 1097.82,1023.58 1089.09,1026.33 1080.62,1029.84 1072.5,1034.07 1064.77,1038.99 1057.51,1044.57 1050.75,1050.75 1044.57,1057.51 1038.99,1064.77 1034.07,1072.5 1029.84,1080.62 1026.33,1089.09 1023.58,1097.82 1021.6,1106.77 1020.4,1115.85 1020.03,1124.32 1020.1,1125 1020.1,2625 1020.03,2625.68 1020.4,2634.15 1021.6,2643.23 1023.58,2652.18 1026.33,2660.91 1029.84,2669.37 1034.07,2677.5 1038.99,2685.22 1044.57,2692.49 1050.75,2699.24 1057.51,2705.43 1064.77,2711.01 1072.5,2715.93 1080.62,2720.16 1089.09,2723.67 1097.82,2726.42 1106.77,2728.4 1115.85,2729.6 1124.33,2729.97 1125,2729.9 1125.02,2729.9 2625,2729.9 2625.68,2729.97
no net on L3 - PWR (split plane): 1376.4,1176.4 1378.05,1175.29 1380,1174.9 1440,1174.9 1441.95,1175.29 1443.6,1176.4 1482.11,1214.9 1557.89,1214.9 1694.9,1077.89 1694.9,1065.1 1302.11,1065.1 1187.21,1180 1280,1272.79
DRAIN on L3 - PWR (split plane): 2634.15,2729.6 2643.23,2728.4 2652.18,2726.42 2660.91,2723.67 2669.38,2720.16 2677.5,2715.93 2685.23,2711.01 2692.49,2705.43 2699.25,2699.25 2705.43,2692.49 2711.01,2685.23 2715.93,2677.5 2720.16,2669.38 2723.67,2660.91 2726.42,2652.18 2728.4,2643.23 2729.6,2634.15 2729.97,2625.68 2729.9,2625 2729.9,1125 2729.97,1124.32 2729.6,1115.85 2728.4,1106.76 2726.42,1097.82 2723.67,1089.09 2720.16,1080.62 2715.93,1072.5 2711.01,1064.77 2705.44,1057.51 2699.25,1050.75 2692.49,1044.56 2685.23,1038.99 2677.5,1034.07 2669.38,1029.84 2660.91,1026.33 2652.18,1023.58 2643.24,1021.6 2634.15,1020.4 2625.68,1020.03 2625,1020.1 1125,1020.1 1124.32,1020.03 1115.85,1020.4 1106.77,1021.6 1097.82,1023.58 1089.09,1026.33 1080.62,1029.84 1072.5,1034.07 1064.77,1038.99 1057.51,1044.57 1050.75,1050.75 1044.57,1057.51 1038.99,1064.77 1034.07,1072.5 1029.84,1080.62 1026.33,1089.09 1023.58,1097.82 1021.6,1106.77 1020.4,1115.85 1020.03,1124.32 1020.1,1125 1020.1,2625 1020.03,2625.68 1020.4,2634.15 1021.6,2643.23 1023.58,2652.18 1026.33,2660.91 1029.84,2669.37 1034.07,2677.5 1038.99,2685.22 1044.57,2692.49 1050.75,2699.24 1057.51,2705.43 1064.77,2711.01 1072.5,2715.93 1080.62,2720.16 1089.09,2723.67 1097.82,2726.42 1106.77,2728.4 1115.85,2729.6 1124.33,2729.97 1125,2729.9 1125.02,2729.9 1199.9,2729.9 1199.9,2597.11 1056.4,2453.6 1055.29,2451.95 1054.9,2450 1054.9,1970 1054.9,1940 1054.9,1300 1055.29,1298.05 1056.4,1296.4 1296.4,1056.4 1298.05,1055.29 1300,1054.9 1899.9,1054.9 1899.9,1050 1900.29,1048.05 1901.4,1046.4 1903.05,1045.29 1905,1044.9 1906.95,1045.29 1908.6,1046.4 1909.71,1048.05 1910.1,1050 1910.1,1054.9 2450,1054.9 2451.95,1055.29 2453.6,1056.4 2693.6,1296.4 2694.71,1298.05 2695.1,1300 2695.1,2450 2694.71,2451.95 2693.6,2453.6 2550.1,2597.11 2550.1,2729.9 2625,2729.9 2625.68,2729.97
+5V on L3 - PWR (split plane): 1599.9,1615.1 1390,1615.1 1388.05,1614.71 1386.4,1613.6 1385.29,1611.95 1384.9,1610 1384.9,1392.11 1180,1187.21 1065.1,1302.11 1065.1,1964.9 1599.9,1964.9
no net on L3 - PWR (split plane): 1899.9,1065.1 1705.1,1065.1 1705.1,1080 1704.71,1081.95 1703.6,1083.6 1563.6,1223.6 1561.95,1224.71 1560,1225.1 1480,1225.1 1478.05,1224.71 1476.4,1223.6 1437.89,1185.1 1382.11,1185.1 1287.21,1280 1393.6,1386.4 1394.71,1388.05 1395.1,1390 1395.1,1419.9 1899.9,1419.9
no net on L3 - PWR (split plane): 2539.9,2595 2540.29,2593.05 2541.4,2591.4 2562.79,2570 2401.4,2408.6 2400.29,2406.95 2399.9,2405 2399.9,2212.11 2162.89,1975.1 1620,1975.1 1605,1975.1 1065.1,1975.1 1065.1,2447.89 1208.6,2591.4 1209.71,2593.05 1210.1,2595 1210.1,2729.9 2539.9,2729.9
no net on L3 - PWR (split plane): 2522.79,1220 2467.89,1165.1 2322.11,1165.1 2268.6,1218.6 2266.95,1219.71 2265,1220.1 1910.1,1220.1 1910.1,1419.9 2322.89,1419.9
no net on L3 - PWR (split plane): 2541.4,1201.4 2562.79,1180 2447.89,1065.1 1910.1,1065.1 1910.1,1209.9 2262.89,1209.9 2316.4,1156.4 2318.05,1155.29 2320,1154.9 2470,1154.9 2471.95,1155.29 2473.6,1156.4 2530,1212.79
no net on L3 - PWR (split plane): 2159.9,1615.1 1610.1,1615.1 1610.1,1964.9 2159.9,1964.9
+VBAT on L3 - PWR (split plane): 2684.9,1302.11 2570,1187.21 2328.6,1428.6 2326.95,1429.71 2325,1430.1 1395.1,1430.1 1395.1,1604.9 2320,1604.9 2321.95,1605.29 2323.6,1606.4 2363.6,1646.4 2364.71,1648.05 2365.1,1650 2365.1,1877.89 2517.11,2029.9 2665,2029.9 2665.49,2030 2684.9,2030
+12V on L3 - PWR (split plane): 2684.9,2447.89 2684.9,2040.2 2665.1,2040.2 2664.61,2040.1 2515,2040.1 2513.05,2039.71 2511.4,2038.6 2356.4,1883.6 2355.29,1881.95 2354.9,1880 2354.9,1652.11 2317.89,1615.1 2170.1,1615.1 2170.1,1967.89 2408.6,2206.4 2409.71,2208.05 2410.1,2210 2410.1,2402.89 2570,2562.79

## Keep-outs
Keep-Out Layer:
  the board outline again, w18

## Other copper
L1 - Top Layer:
  rectangle net DRAIN: 1105.51,2331.69 1294.49,2331.69
  pour cut-out: 1211.66,2345.03 1188.34,2345.03 1188.34,2349 1211.66,2349
  pour cut-out: 1188.34,1719.93 1211.66,1719.93 1211.66,1715.96 1188.34,1715.96
L4 - Bottom Layer:
  pour cut-out: 1211.66,1719.93 1188.34,1719.93 1188.34,1715.96 1211.66,1715.96
  pour cut-out: 1188.34,2345.03 1211.66,2345.03 1211.66,2349 1188.34,2349
L3 - PWR (plane layer: these items are gaps in the copper):
  lines w10: 1000,1960 1010,1970 ; 1060,1940 1060,1970 2165,1970 ; 1180,1180 1390,1390 1390,1610 1605,1610 1605,1970 1620,1970 ; 1205,2745 1205,2595 1060,2450 1060,1300 1300,1060 2450,1060 2690,1300 2690,2450 2545,2595 2545,2745 ; 1280,1280 1380,1180 1440,1180 1480,1220 1560,1220 1700,1080 1700,1060 1680,1060 1660,1060 ; 1390,1425 1905,1425 ; 1599.9,1610 2165,1610 ; 1905,1215 2265,1215 2320,1160 2470,1160 2530,1220 2545,1205 ; 1920,1060 1905,1060 1905,1050 1905,1425 ; 2570,1180 2325,1425 1905,1425 ; 2570,2570 2405,2405 2405,2210 2165,1970 ; 2684.9,2035.1 2665.1,2035.1 2665,2035 2515,2035 2360,1880 2360,1650 2320,1610 2165,1610 ; 2165,1610 2165,1970

## Silkscreen, mask and mechanical layers (free items; w line width, h text height)
Top Overlay:
  text "Let's Build Rockets" at 1645,2320 h30
  text ".DocumentNumber" at 1645,2270 h30
  text ".revision" at 2010,2270 h30
  text ".print_Date" at 1645,2220 h30
Outline:
  the board outline again, w5